# EAGLE board nodemcu1 (EAGLE 9.5.2)
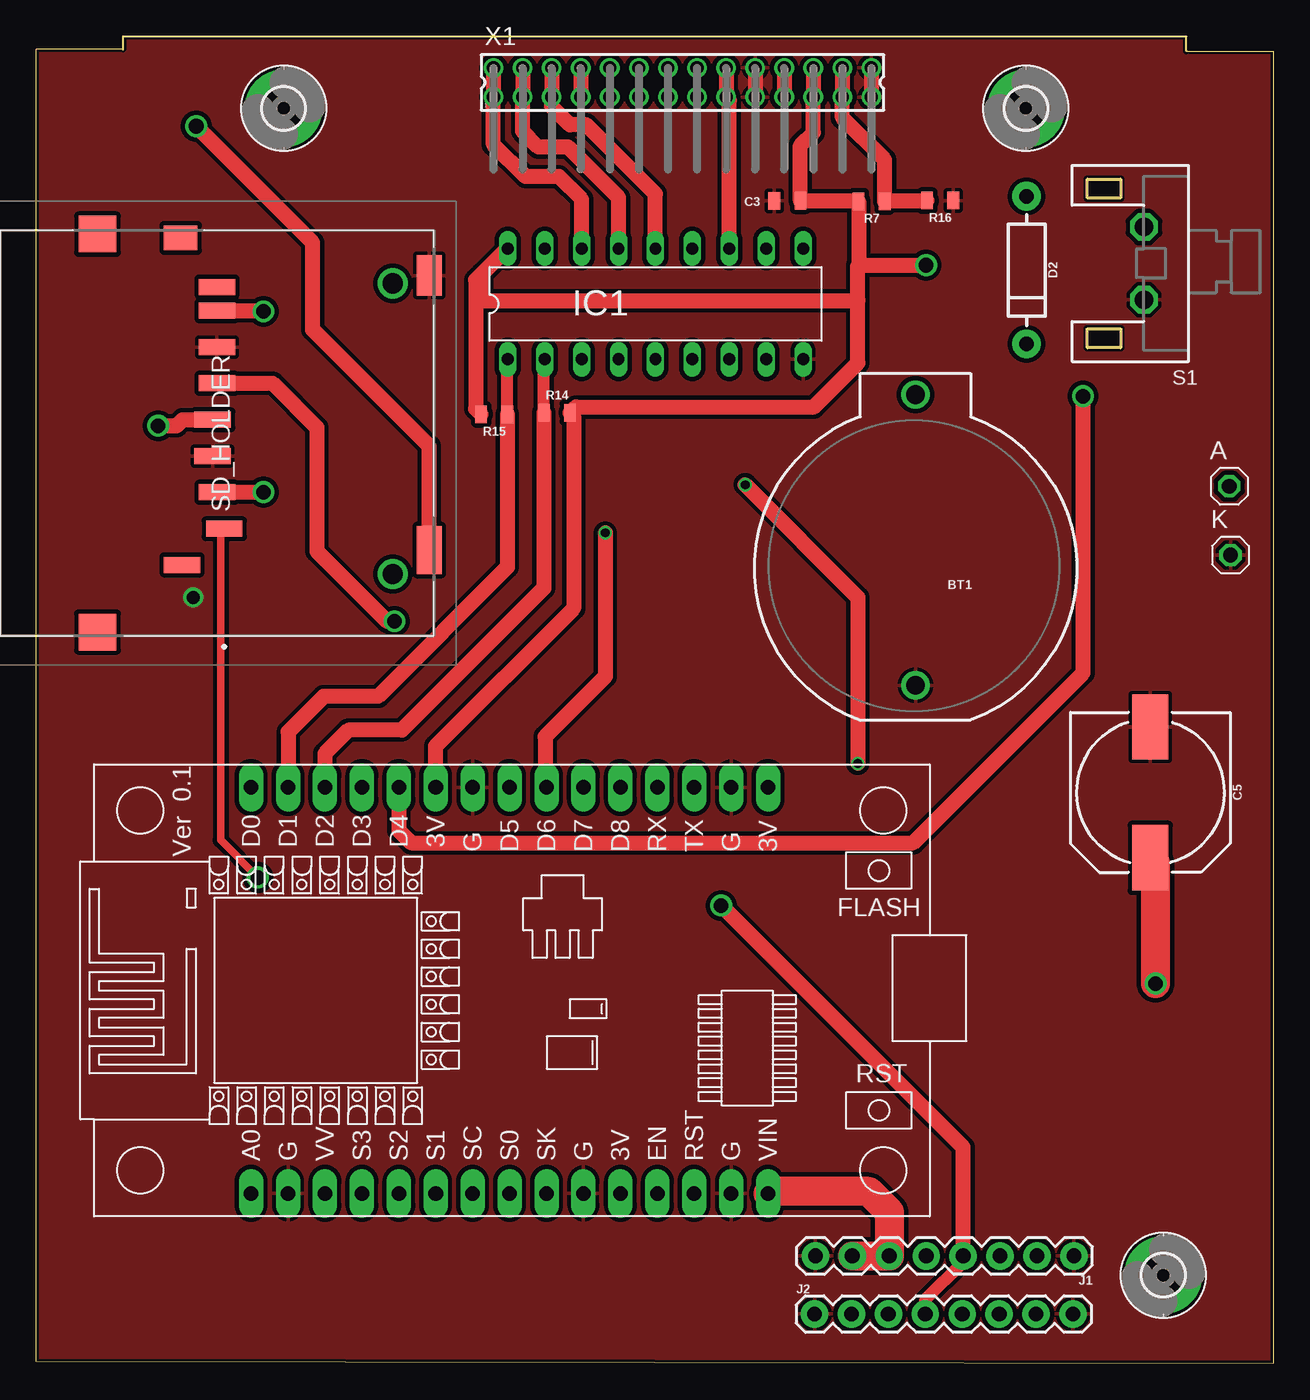
[diagram p0: board, top side]
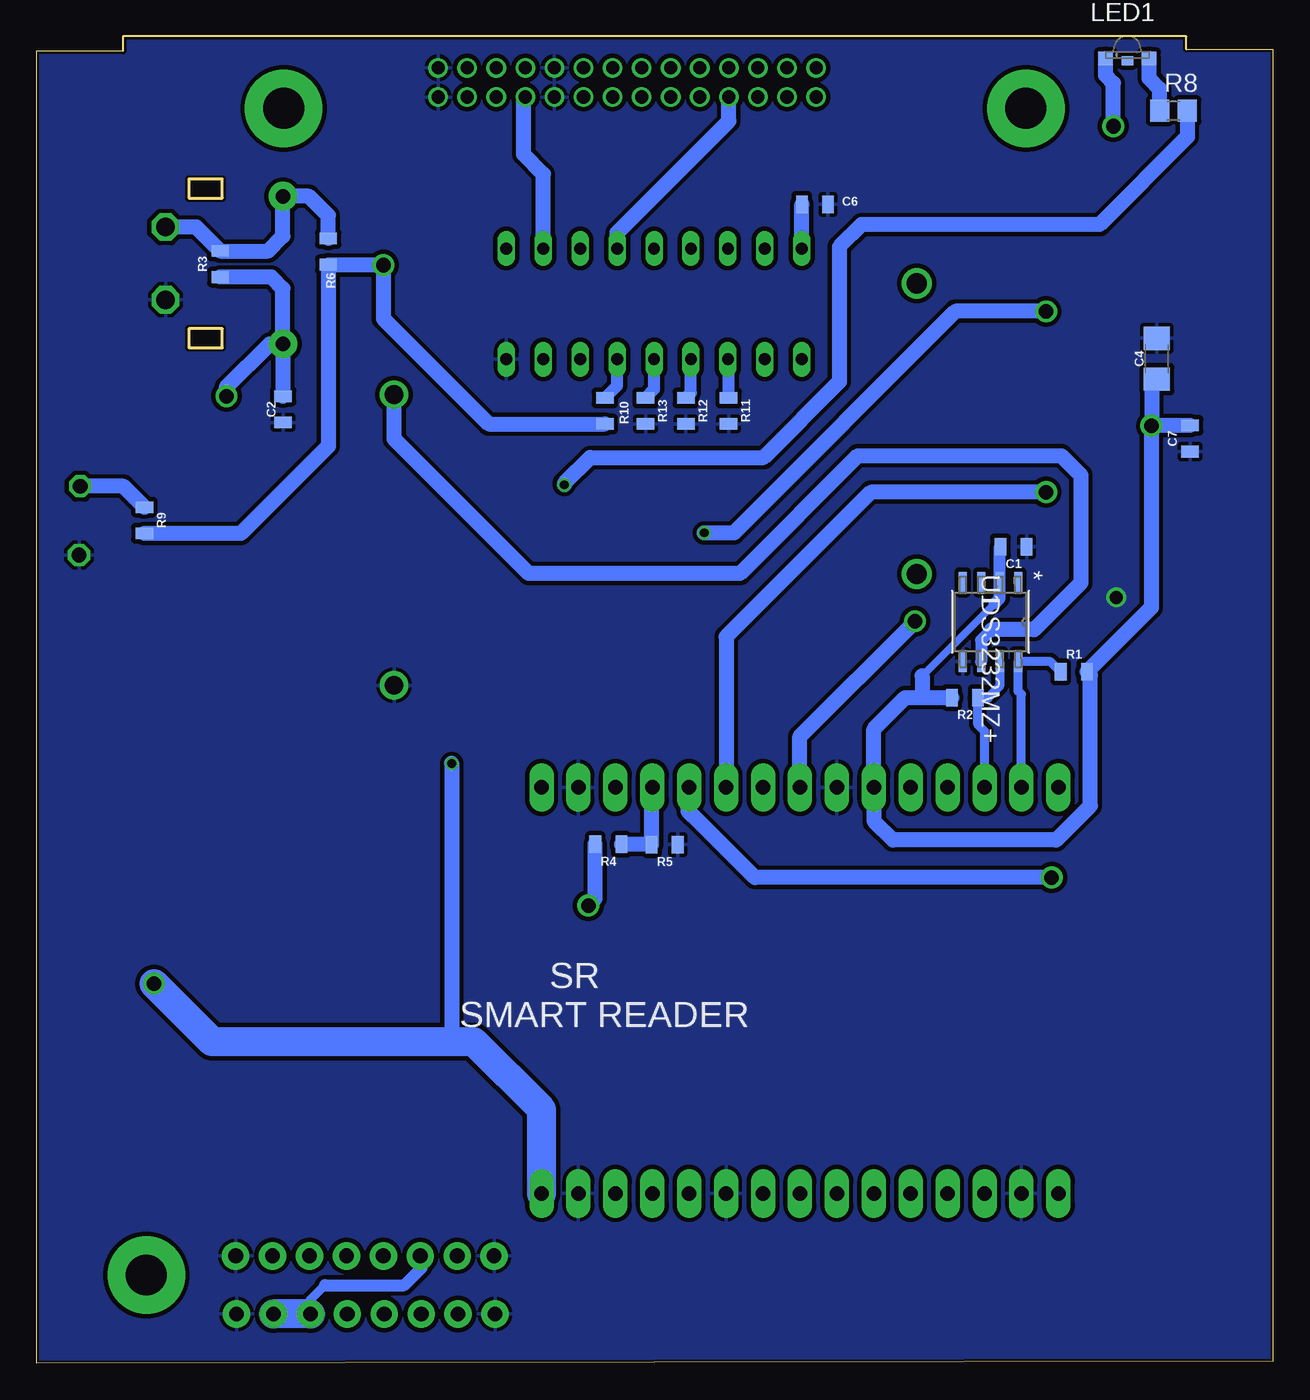
[diagram p1: board, bottom side, seen from below]

Size 85.09 x 91.31 mm. Coordinates in mm from the lower left corner, seen from the top.
Outline: 5.97,91.31 79.12,91.31 79.12,90.3 85.09,90.3 85.09,0 0,0.13 0,90.42 5.97,90.42 5.97,91.31
Copper layers (1*16): Top 0.035mm / dielectric 1.5mm / Bottom 0.035mm
Design rules "SparkFun-2-layer-PCBWay-LIMIT": minimum track width 6mil, minimum drill 0.3mm, track to track 6mil, track to pad 6mil, pad to pad 6mil, via to via 6mil, smd to smd 6mil, copper to edge 6mil, drill to drill 6mil, minimum pad ring 6mil, minimum via ring 6mil, stop-mask expansion 4mil, vias tented up to drill 25mil, thermal gap 10mil
Net classes: 1 signal: width 0.254 mm, drill 0.305 mm, clearance 0.305 mm; 2 power: width 0.508 mm, drill 0.61 mm, clearance 0.305 mm

## Footprints (pad centres in the part's own frame; a part is rotated, then mirrored left to right if it is on the bottom)
1X01 = drill 1.016 octagon: 1 0,0
BATTCOM_20MM_PTH = drill 1.3: 1 11.85,0; 2 -8.15,0
0805 = smd 0.8 x 1.2: 1 -0.9,0; 2 0.9,0
1206 = smd 1.6 x 1.8: 1 -1.4,0; 2 1.4,0
NIC_10X10.5_CAP = smd 4.5 x 2.5: + 4.5,0; - -4.5,0
DIODE-1N4001 = drill 1 pad 1.981: A -5.08,0; C 5.08,0
2,8-PAD = drill 2.8 pad 5.334: B2,8 0,0
DIL18 = drill 0.813 long: 1 -10.16,-3.81; 2 -7.62,-3.81; 3 -5.08,-3.81; 4 -2.54,-3.81; 5 0,-3.81; 6 2.54,-3.81; 7 5.08,-3.81; 8 7.62,-3.81; 9 10.16,-3.81; 10 10.16,3.81; 11 7.62,3.81; 12 5.08,3.81; 13 2.54,3.81; 14 0,3.81; 15 -2.54,3.81; 16 -5.08,3.81; 17 -7.62,3.81; 18 -10.16,3.81
1X08 = drill 1.016 pad 1.88: 1 0,0; 2 2.54,0; 3 5.08,0; 4 7.62,0; 5 10.16,0; 6 12.7,0; 7 15.24,0; 8 17.78,0
OSRAM-SIDELED = smd 1 x 0.9: A 1.5,0; C -1.5,0 | smd 0.8 x 0.6: P$1 0,-0.15
R0805 = smd 1.3 x 1.5: 1 -0.95,0; 2 0.95,0
TL1100C = drill 1.27 octagon: 1 2.5,0; 2 -2.5,0
5009980900 = smd 1.1 x 2.5: 1 -6.575,-0.225; 2 -4.075,0.275; 3 -1.575,0.575; 4 0.925,0.575; 5 3.425,0.275; 6 5.925,0.275; 7 8.425,0.275; 8 10.05,0.275; 9 -9.075,2.675 | smd 1.7 x 2.3: 10 13.425,2.775 | smd 2.8 x 1.7: 11 10.85,-14.325 | smd 3.3 x 1.7: 12 -8.05,-14.325 | smd 2.5 x 2.6: 13 -13.7,8.495; 14 13.7,8.495 | drill 1.39 pad 2.085: 15 -9.7,-11.825; 16 10.3,-11.825
21-0041B_8 = smd 1.455 x 0.543: 1 -2.721,1.905; 2 -2.721,0.635; 3 -2.721,-0.635; 4 -2.721,-1.905; 5 2.721,-1.905; 6 2.721,-0.635; 7 2.721,0.635; 8 2.721,1.905
NODEMCU = drill 1 pad 1.676 long: 1 -13.97,17.78; 2 -13.97,15.24; 3 -13.97,12.7; 4 -13.97,10.16; 5 -13.97,7.62; 6 -13.97,5.08; 7 -13.97,2.54; 8 -13.97,0; 9 -13.97,-2.54; 10 -13.97,-5.08; 11 -13.97,-7.62; 12 -13.97,-10.16; 13 -13.97,-12.7; 14 -13.97,-15.24; 15 -13.97,-17.78; 16 13.97,-17.78; 17 13.97,-15.24; 18 13.97,-12.7; 19 13.97,-10.16; 20 13.97,-7.62; 21 13.97,-5.08; 22 13.97,-2.54; 23 13.97,0; 24 13.97,2.54; 25 13.97,5.08; 26 13.97,7.62; 27 13.97,10.16; 28 13.97,12.7; 29 13.97,15.24; 30 13.97,17.78
332-28 = drill 0.9 pad 1.27: 1 -13,-1; 2 -13,1; 3 -11,-1; 4 -11,1; 5 -9,-1; 6 -9,1; 7 -7,-1; 8 -7,1; 9 -5,-1; 10 -5,1; 11 -3,-1; 12 -3,1; 13 -1,-1; 14 -1,1; 15 1,-1; 16 1,1; 17 3,-1; 18 3,1; 19 5,-1; 20 5,1; 21 7,-1; 22 7,1; 23 9,-1; 24 9,1; 25 11,-1; 26 11,1; 27 13,-1; 28 13,1

## Placement (x,y rotation side)
A  [1X01]  82.07,60.35 0 top
BT1  [BATTCOM_20MM_PTH]  60.48,54.8 90 top
C1  0.1µF  [0805]  17.86,56.19 180 bottom
C2  1uF  [0805]  68.11,65.64 270 bottom
C3  .1uF  [0805]  51.67,79.99 0 top
C4  1.0uF  [1206]  8,69.13 90 bottom
C5  470uF  [NIC_10X10.5_CAP]  76.63,39.28 270 top
C6  0.1uF  [0805]  31.53,79.76 0 bottom
C7  0.1µF  [0805]  5.71,63.64 90 bottom
D2  1A/50V/1.1V  [DIODE-1N4001]  68.12,75.23 270 top
H1  MOUNT-PAD-ROUND2.8  [2,8-PAD]  17.02,86.36 0 top
H2  MOUNT-PAD-ROUND2.8  [2,8-PAD]  68.07,86.36 0 top
H4  MOUNT-PAD-ROUND2.8  [2,8-PAD]  77.53,6.06 0 top
IC1  MCP23008/P  [DIL18]  42.59,72.9 0 top
J1  [1X08]  71.38,7.38 180 top
J2  [1X08]  53.54,3.38 0 top
K  [1X01]  82.15,55.61 0 top
LED1  [OSRAM-SIDELED]  10.03,89.79 0 bottom
R1  4k7  [0805]  13.71,47.57 0 bottom
R2  4k7  [0805]  21.2,45.81 180 bottom
R3  4k7  [0805]  72.44,75.64 90 bottom
R4  1K  [0805]  45.74,35.7 180 bottom
R5  2K  [0805]  41.87,35.68 180 bottom
R6  20k  [0805]  65.01,76.5 270 bottom
R7  48.7K  [0805]  57.47,79.96 180 top
R8  330  [R0805]  6.85,86.2 0 bottom
R9  100  [0805]  77.66,58.01 270 bottom
R10  4k7  [0805]  45.97,65.53 90 bottom
R11  10k  [0805]  37.47,65.53 270 bottom
R12  10k  [0805]  40.4,65.53 270 bottom
R13  10k  [0805]  43.18,65.53 270 bottom
R14  4k7  [0805]  35.81,65.41 0 top
R15  4k7  [0805]  31.5,65.3 180 top
R16  45.3R  [0805]  62.18,80.01 180 top
S1  TL1100C  [TL1100C]  76.2,75.69 90 top
SD_HOLDER  500998-0900  [5009980900]  12.7,64.01 90 top
U1  DS3232MZ+  [21-0041B_8]  19.45,51.01 270 bottom
U$1  NODEMCU  [NODEMCU]  32.56,25.65 90 top
X1  332-28  [332-28]  44.45,88.14 0 top

## Library data of the parts
A K = pinhead
BT1 = SparkFun-Batteries; PROD_ID: BATT-09031; SF_SKU: PRT-00783
C1 C7 = SparkFun-Capacitors; PROD_ID: CAP-08469
C2 C3 C6 = SparkFun-Capacitors; PROD_ID: CAP-08064
C4 = SparkFun-Capacitors; PROD_ID: CAP-09822
C5 = SparkFun-Capacitors; PROD_ID: CAP-08362
D2 = SparkFun-DiscreteSemi; PROD_ID: DIO-09176
H1 H2 H4 = holes
IC1 LED1 = adafruit
J1 J2 = SparkFun-Connectors; PROD_ID: CONN-08438
R1-R7 R9-R16 = SparkFun-Resistors; PROD_ID: RES-09883
R8 = rcl; SPICEPREFIX: R
S1 = switch-e-switch
SD_HOLDER = SamacSys_Parts; ALLIED_NUMBER: 70266950; ALLIED_PRICE-STOCK: https://www.alliedelec.com/molex-incorporated-500998-0900/70266950/; DESCRIPTION: 9 way normal mount SD card connector 9 way normal mount SD card connector; HEIGHT: 3mm; MANUFACTURER_NAME: Molex; MANUFACTURER_PART_NUMBER: 500998-0900; MOUSER_PART_NUMBER: 538-500998-0900; MOUSER_PRICE-STOCK: https://www.mouser.com/Search/Refine.aspx?Keyword=538-500998-0900; RS_PART_NUMBER: 4879327; RS_PRICE-STOCK: http://uk.rs-online.com/web/p/products/4879327
U1 = ds3232; BUILT_BY: EMA_UL_Team; MANUFACTURER_PART_NUMBER: DS3232MZ+; VENDOR: Maxim Integrated Products
U$1 = nodemcu
X1 = con-garry

## Nets
3.3V [power]: C1.2 C3.2 C4.1 C6.1 C7.2 IC1.18 R1.2 R2.2 R6.2 R7.2 R9.2 R10.1 R14.2 R15.2 SD_HOLDER.4 U1.2 U$1.25 X1.23 X1.24
BUTTON [power]: C2.1 D2.C R3.1 U$1.26
CLK [signal]: SD_HOLDER.5 U$1.23
CS [signal]: SD_HOLDER.1 U$1.20
D4_LCD [signal]: IC1.13 X1.7 X1.8
D5_LCD [signal]: IC1.14 X1.5 X1.6
D6_LCD [signal]: IC1.15 X1.3 X1.4
D7_LCD [signal]: IC1.16 X1.1 X1.2
EN_LCD [signal]: IC1.12 X1.17 X1.18
ESP_RX [signal]: R4.1 R5.2 U$1.19
GND [power]: BT1.2 C1.1 C2.2 C3.1 C4.2 C5.- C6.2 C7.1 IC1.9 J1.1 J1.8 J2.1 J2.8 K.1 R5.1 R11.2 R12.2 R13.2 R16.1 S1.2 SD_HOLDER.3 SD_HOLDER.6 SD_HOLDER.11 U1.5 U$1.2 U$1.10 U$1.14 U$1.17 U$1.24 X1.19 X1.20 X1.27 X1.28
MISO [signal]: SD_HOLDER.7 U$1.22
MOSI [signal]: SD_HOLDER.2 U$1.21
N$1: D2.A R3.2 R6.1 S1.1
N$2: U$1.11
N$3 [power]: A.1 R9.1
N$4: IC1.6 R10.2
N$5: IC1.3 R11.1
N$6 [signal]: R7.1 R16.2 X1.25 X1.26
N$7: IC1.4 R12.1
N$8: IC1.5 R13.1
N$9: U$1.16
N$25: LED1.C SD_HOLDER.12
N$31 [power]: LED1.A R8.1
RS [signal]: IC1.11 X1.21 X1.22
SCL [signal]: IC1.1 R1.1 R15.1 U1.8 U$1.29
SDA [signal]: IC1.2 R2.1 R14.1 U1.7 U$1.28
TX_MIDMARK [power]: J1.4 J2.4 R4.2
VBAT [power]: BT1.1 U1.6
VCC [power]: C5.+ J1.6 J1.7 J2.6 J2.7 R8.2 U$1.15

## Tracks (layer width: path | path; a pad name or v marks a point on that pad's centre or on a via)
3.3V  (via drill 1)
  Top 0.508: 32.38,76.71 IC1.18
  Top 1.016: v8.38,64.52 9.65,64.52 10.07,64.93 SD_HOLDER.4 | X1.24 X1.23 53.45,84.69 52.57,83.81 C3.2 56.53,79.99 R7.2 56.57,75.56 | 56.57,75.56 56.52,75.56 56.52,73.13 | 56.57,75.56 v61.21,75.56 | 30.63,74.95 30.63,73.13 56.52,73.13 | 32.38,76.71 30.63,74.95 | U$1.25 27.48,42.46 36.96,51.94 36.96,65.16 R14.2 37.11,65.8 53.48,65.8 56.52,68.83 56.52,73.13 | R15.2 30.22,65.68 30.22,74.54 30.63,74.95
  Bottom 0.508: 19.16,52.29 24.16,47.3
  Bottom 0.813: C6.1 | 19.16,52.29 18.82,52.63 U1.2 18.82,56.13 C1.2
  Bottom 1.016: C7.2 8.36,64.54 | 8.36,64.54 v8.38,64.52 8.38,52 R1.2 12.57,47.33 12.57,38.35 14.94,35.99 26.16,35.99 27.43,37.26 27.43,39.67 U$1.25 27.48,43.64 25.31,45.81 24,45.81 | C4.1 8.36,67.37 8.36,64.54 | IC1.18 C6.1 | 24,45.81 R2.2 | 24.16,47.3 24.16,45.96 24,45.81 | R9.2 71.01,57.11 65.01,63.11 R6.2 64.97,75.56 v61.21,75.56 61.21,71.88 53.96,64.63 R10.1
BUTTON  (via drill 1)
  Top 1.016: U$1.26 24.94,36.66 25.78,35.81 60.33,35.81 72.01,47.5 v72.01,66.55
  Bottom 1.016: D2.C 68.12,73.96 68.9,74.74 R3.1 | D2.C 68.12,66.56 C2.1 | v72.01,66.55 72.01,67.18 69.05,70.15 D2.C
CLK  (via drill 1)
  Top 1.016: v24.64,51.05 24.13,51.05 19.3,55.88 19.3,64.39 16.26,67.43 SD_HOLDER.5
  Bottom 1.016: U$1.23 32.56,43.14 v24.64,51.05
CS  (via drill 1)
  Top 0.508: v15.24,33.43 12.67,36 12.67,57.18 SD_HOLDER.1
  Bottom 1.016: v15.24,33.43 35.66,33.43 40.01,37.77 40.01,37.72 40.26,37.97 40.26,39.54 U$1.20
D4_LCD
  Top 1.016: X1.8 X1.7
  Bottom 1.016: IC1.13 45.13,77.8 37.45,85.49 X1.7
D5_LCD
  Top 1.016: X1.6 X1.5 35.45,86.47 36.7,85.22 37.85,85.22 42.59,80.47 IC1.14
D6_LCD
  Top 1.016: X1.4 X1.3 33.45,84.79 34.54,83.69 36.58,83.69 40.05,80.22 IC1.15
D7_LCD
  Top 1.016: X1.2 X1.1 31.45,83.87 33.66,81.66 35.94,81.66 37.51,80.09 IC1.16
EN_LCD
  Top 1.016: X1.18 X1.17 47.67,86.91 IC1.12
ESP_RX
  Bottom 1.016: R4.1 44.82,35.68 R5.2 42.77,39.58 U$1.19
GND  (via drill 0.9)
  Top 1.016: X1.28 X1.27 | X1.20 X1.19
  other vias: 10.79,52.71
  pour Top: -2,96.13 94,96.13 94,-5.87 -6,-5.87 -7,-4.87 -7,96.13
  pour Bottom: -7,96.13 94,96.13 94,-5.87 -6,-5.87 -7,-4.87
MISO  (via drill 0.61, 1)
  Top 0.813: 15.58,72.43 v15.62,72.39
  Top 1.016: SD_HOLDER.7 15.58,72.43 | v39.14,57.14 39.14,47.27 35,43.13 35,39.72 U$1.22
  Bottom 1.016: v15.62,72.39 21.86,72.39 37.11,57.14 v39.14,57.14
MOSI  (via drill 1)
  Top 1.016: SD_HOLDER.2 15.61,59.93 v15.62,59.94
  Bottom 1.016: v15.62,59.94 27.69,59.94 37.64,49.99 U$1.21
N$1
  Bottom 1.016: S1.1 74.08,78.19 R3.2 69.12,76.54 68.12,77.55 D2.A 66.34,80.31 65.01,78.98 R6.1
N$3
  Bottom 1.016: R9.1 79.1,60.35 A.1
N$4
  Bottom 0.813: R10.2 45.13,67.27 IC1.6
N$5
  Bottom 0.813: R11.1 37.47,69.04 IC1.3
N$6
  Top 1.016: R16.2 58.42,80.01 R7.1 58.37,82.81 55.45,85.73 X1.25 X1.26
N$7
  Bottom 0.813: R12.1 40.05,66.78 IC1.4
N$8
  Bottom 0.813: R13.1 42.59,67.02 IC1.5
N$25  (via drill 1)
  Top 1.016: SD_HOLDER.12 27.02,63.1 19,71.13 19,77.13 v11,85.13
  Bottom 1.016: v11,85.13 11,88.09 11.53,88.62 LED1.C
N$31
  Bottom 1.016: R8.1 7.8,87.68 8.53,88.42 LED1.A
RS
  Top 1.016: X1.22 X1.21
  Bottom 1.016: IC1.11 50.21,81.84 51.56,83.19 51.56,87.03 X1.21
SCL
  Top 0.813: R15.1 32.4,69.05 IC1.1
  Top 1.016: R15.1 32.4,54.78 23.51,45.89 19.76,45.89 17.32,43.44 U$1.29
  Bottom 0.61: U$1.29 17.32,46.02 17.55,46.25 U1.8 15.33,48.29 R1.1
SDA
  Top 0.813: R14.1 34.91,69.03 IC1.2
  Top 1.016: R14.1 34.91,53.33 25.15,43.56 21.46,43.56 19.86,41.96 U$1.28
  Bottom 0.61: U1.7 18.82,46.59 19.6,45.81 R2.1 | U$1.28 19.86,43.48 20.32,43.94 20.32,45.79
  Bottom 0.813: 20.32,45.79 R2.1
TX_MIDMARK  (via drill 1)
  Top 0.813: J2.4 61.16,4.39 63.76,6.99 J1.4
  Top 1.016: J1.4 63.76,14.86 v47.12,31.5
  Bottom 1.016: v47.12,31.5 46.64,31.97 R4.2
VBAT
  Bottom 0.813: U1.6 20.09,49.76 19.37,50.48
  Bottom 1.016: 19.37,50.48 16.45,50.48 13.23,53.7 13.23,61.11 14.58,62.46 28.57,62.46 36.68,54.36 51.23,54.36 60.48,63.61 BT1.1
VCC  (via drill 0.61, 1)
  Top 1.016: v48.77,60.45 56.52,52.71 v56.52,41.28
  Top 2: v77,26.13 77,34.41 C5.+ | U$1.15 50.46,11.81 57.28,11.81 58.68,10.41 J1.6 J1.7
  Bottom 0.61: J2.6 66.24,4.38 65.24,5.37
  Bottom 0.813: J1.6 58.55,7.25 58.55,6.6 59.78,5.37 65.24,5.37
  Bottom 1.016: R8.2 5.9,84.4 11.94,78.36 28.32,78.36 29.84,76.83 29.84,67.54 35.05,62.33 47,62.33 48.77,60.56 v48.77,60.45 | v56.52,41.28 56.52,22.25 56.39,22.13
  Bottom 2: U$1.15 50.34,17.46 55,22.13 56.39,22.13 73,22.13 v77,26.13 | J2.6 J2.7

## Text on the board
bPlace: SR / SMART READER